# Altium PCB Driver.PcbDoc
Units mil, origin at the board's own origin, x right, y up, seen from the top; angles counter-clockwise.
Board outline 2559.06 x 2559.06 mil, 2 copper layers (Top Layer, Bottom Layer); 32 components, 34 nets, 97 pads, 16 vias.
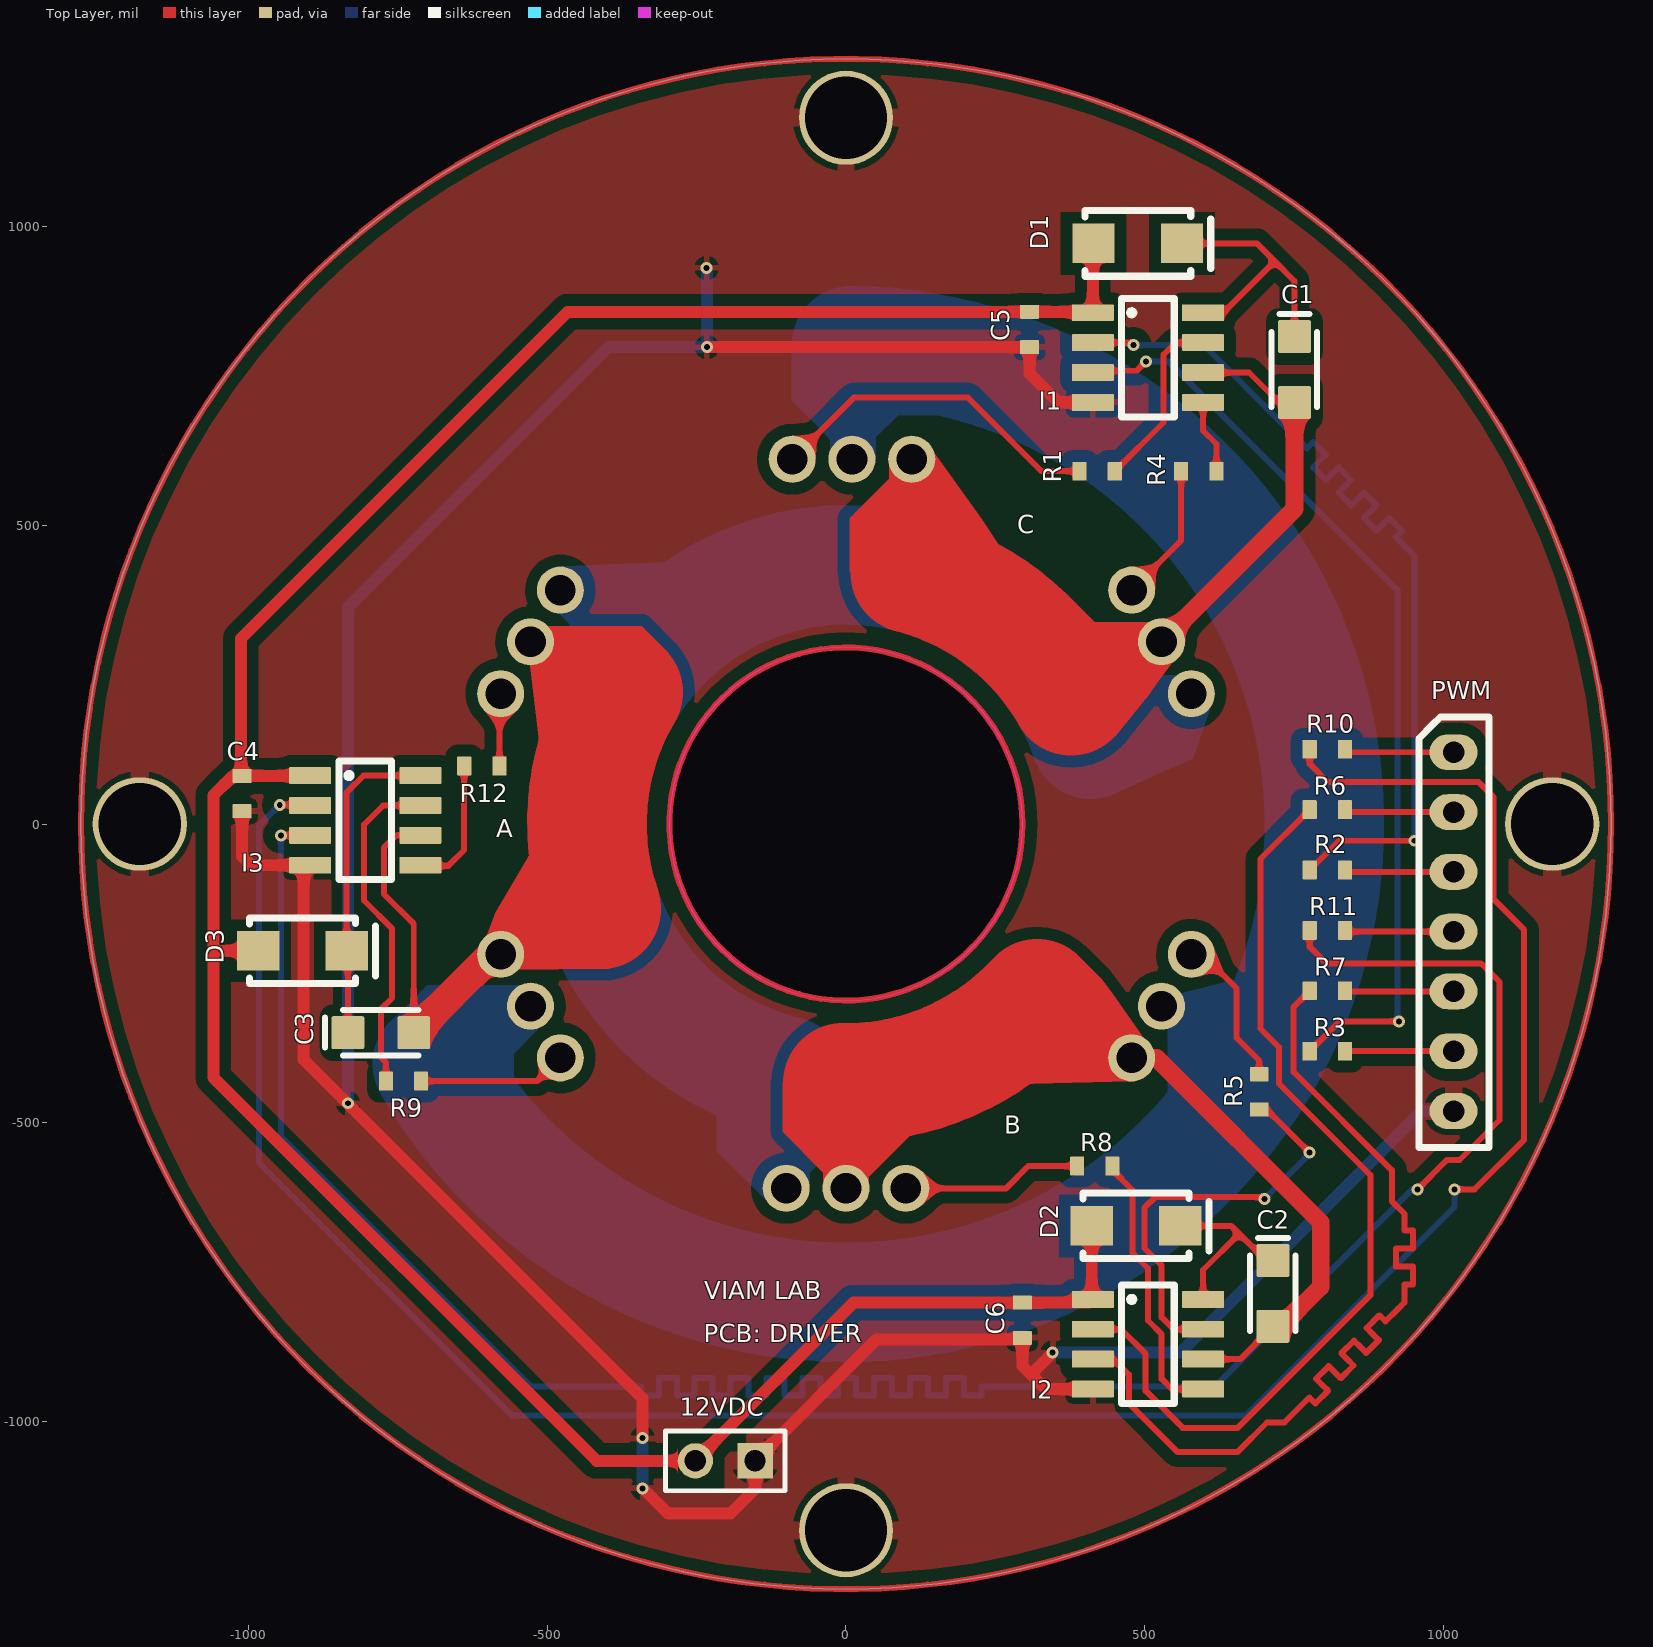
[diagram p0: Top Layer view]
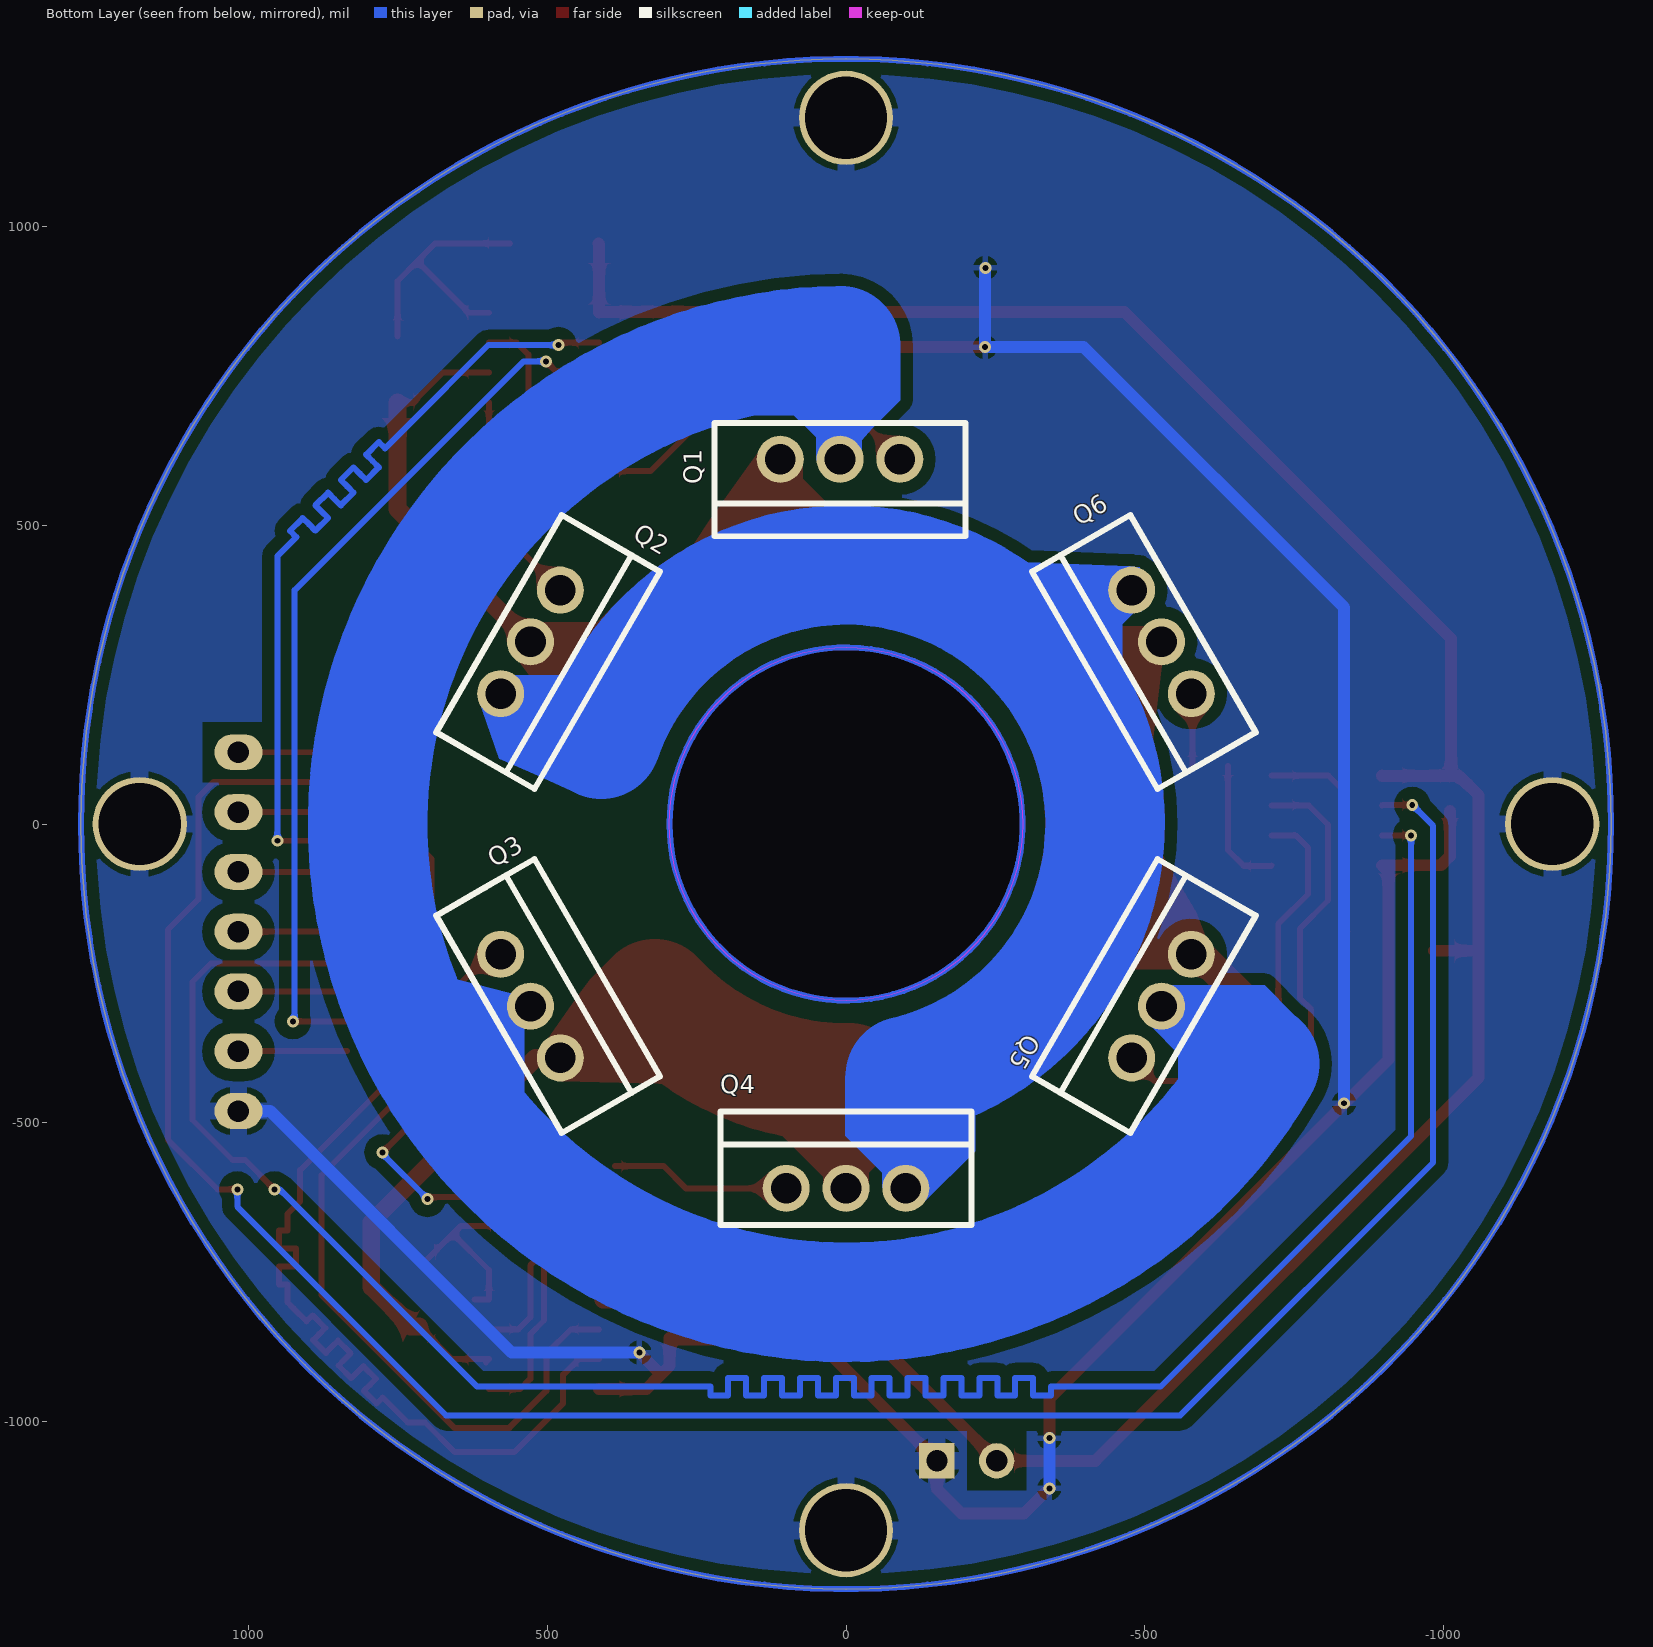
[diagram p1: Bottom Layer view, seen from below]
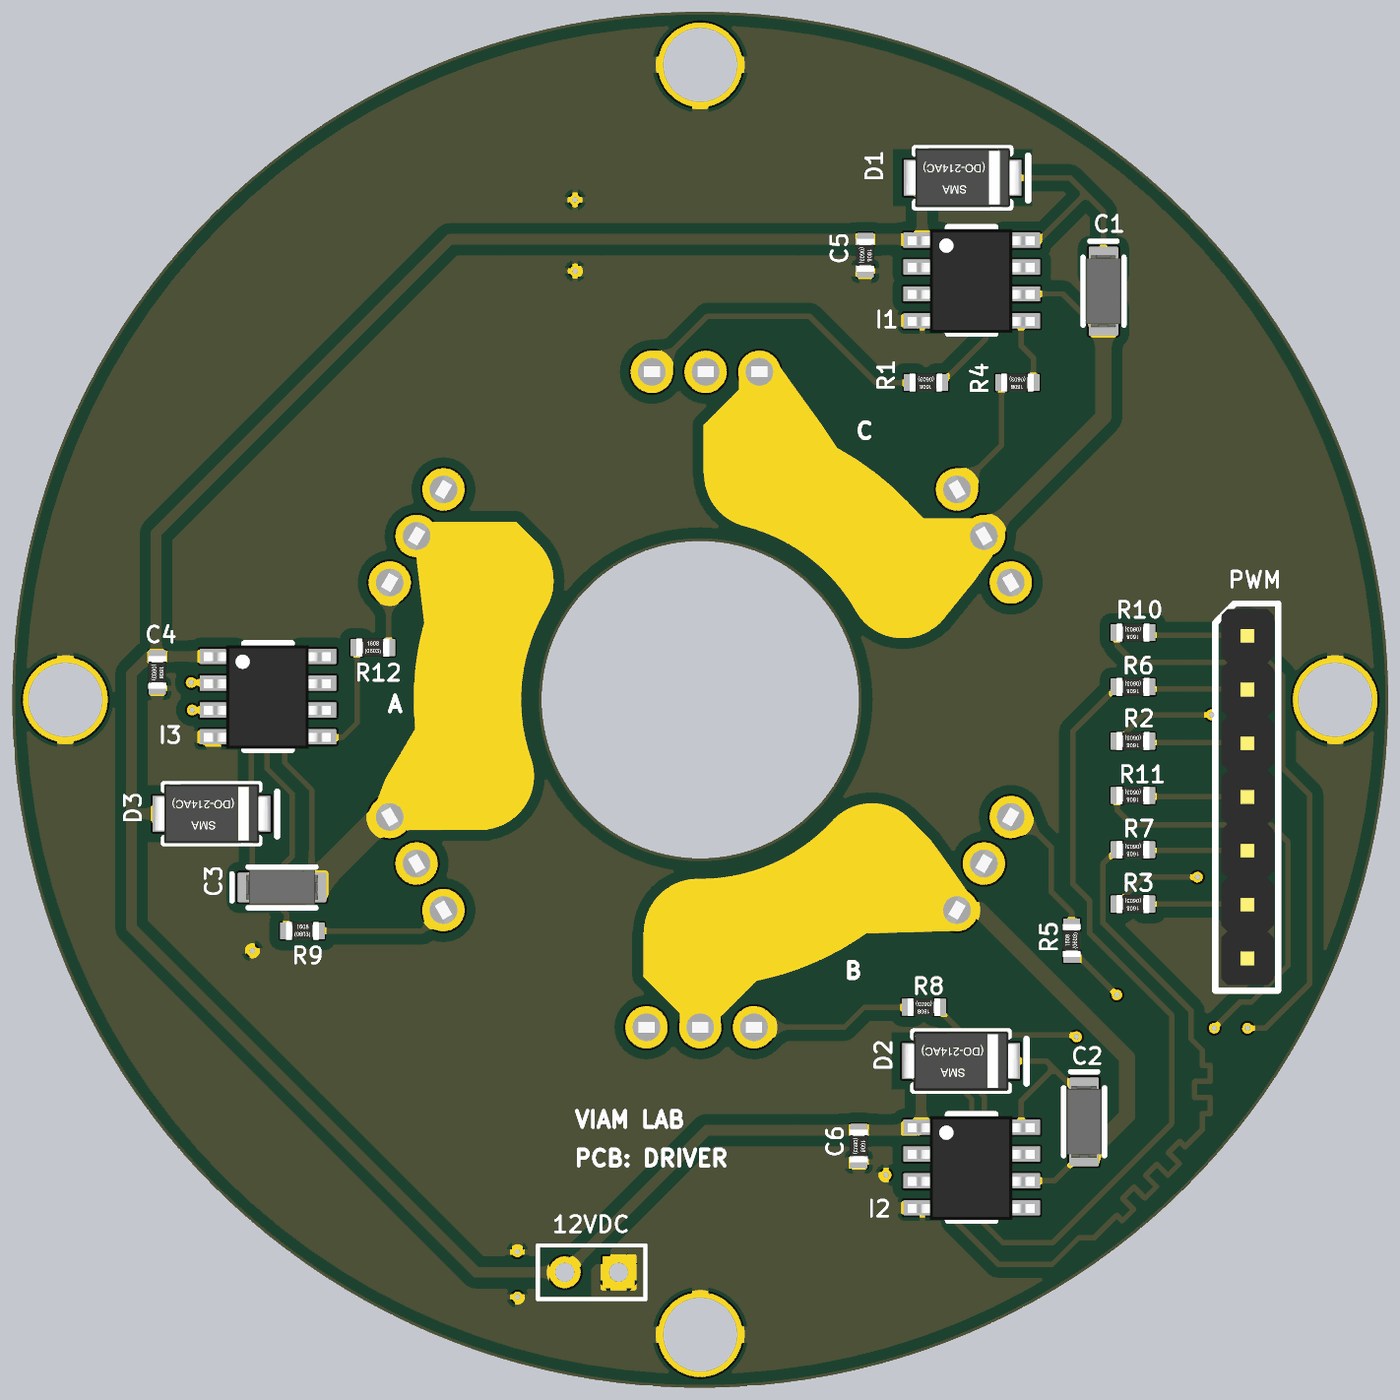
[diagram p2: 3D render of the assembled board from above, using the file's embedded part models]
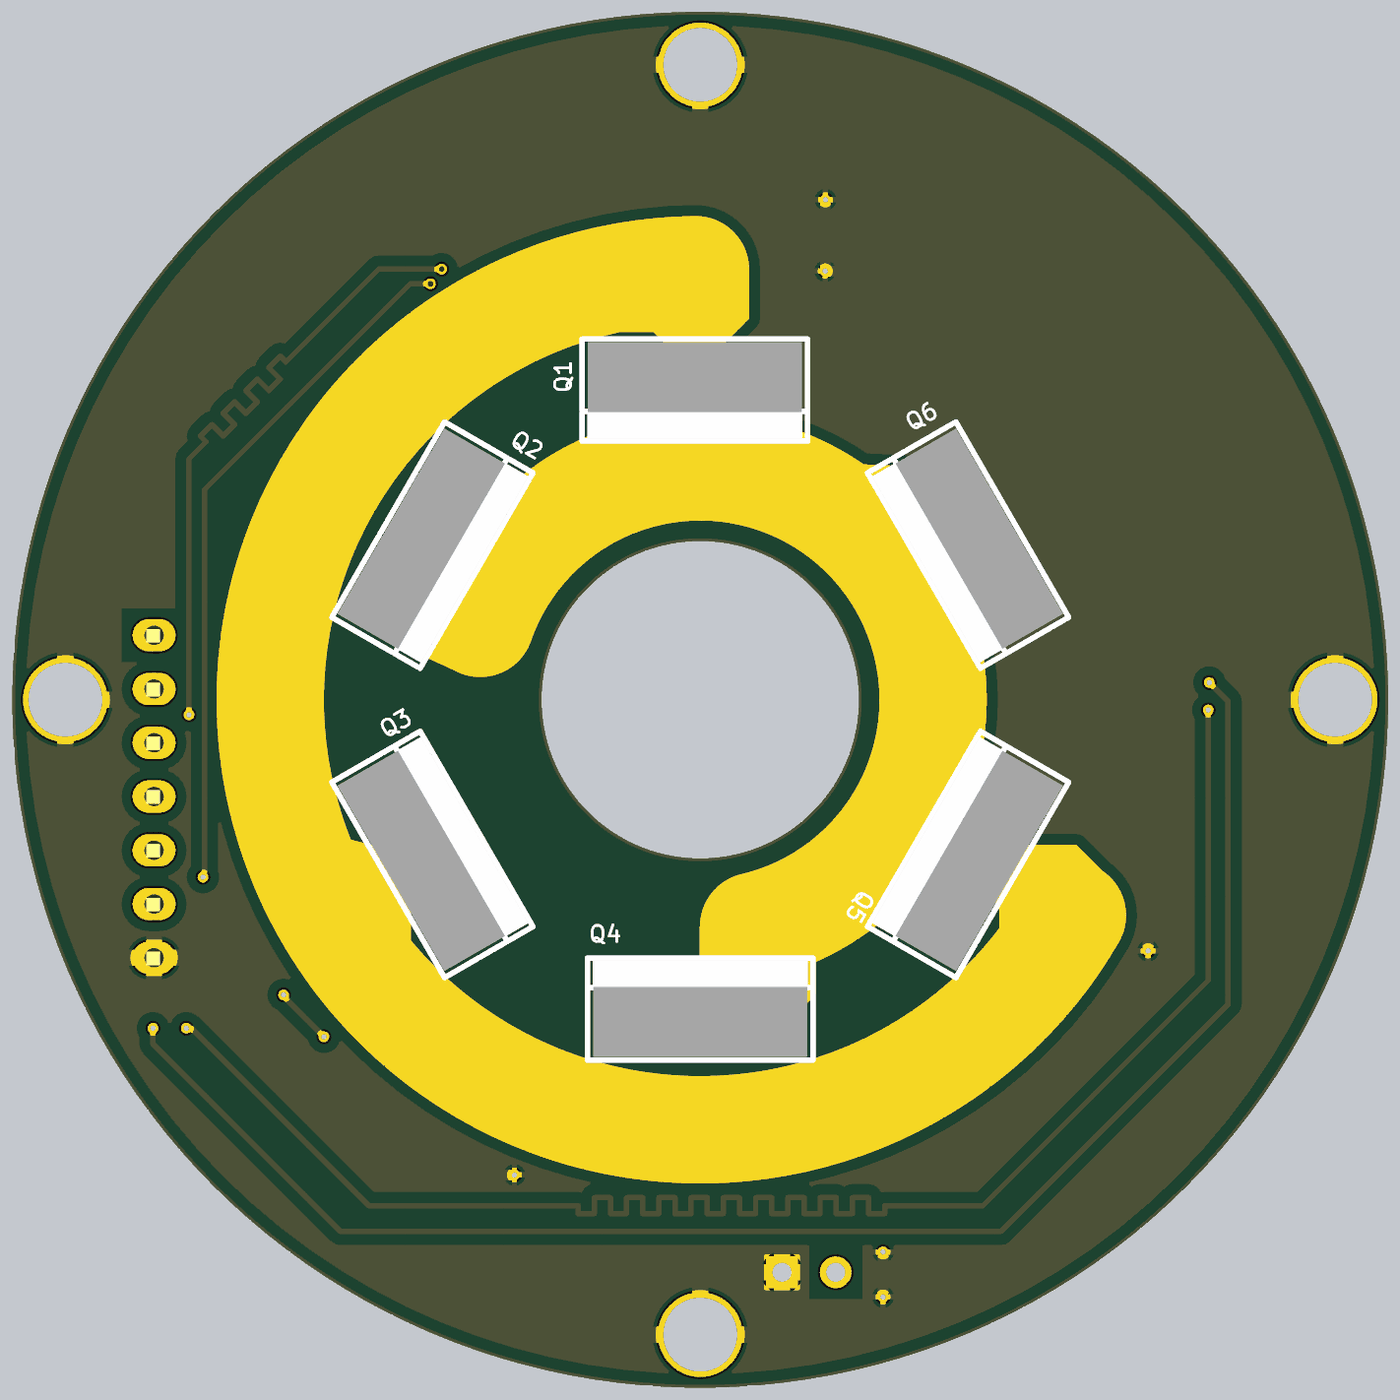
[diagram p3: 3D render of the assembled board from below, using the file's embedded part models]

## Layer stack, top to bottom
Top Solder: solder mask 0.4, Solder Resist, Dk 3.5
Top Layer: signal copper 1.4
Dielectric 1: dielectric 12.6, FR-4, Dk 4.8
Bottom Layer: signal copper 1.4
Bottom Solder: solder mask 0.4, Solder Resist, Dk 3.5

## Board outline
-1279.53,0 ccw(c0,0) 0,-1279.53 ccw(c0,0) 1279.53,0 ccw(c0,0) 0,1279.53 ccw(c0,0)
cut-out: -295.28,0 ccw(c0,0) 0,-295.28 ccw(c0,0) 295.28,0 ccw(c0,0) 0,295.28 ccw(c0,0)

## Design rules (kind name [scope] priority, off if disabled: settings)
Clearance [All] p1: gap=20 ignorepadtopadclearanceinfootprint=FALSE
MatchedLengths PWM_3 [InNetClass('PWM_3')] p1: tolerance=10 checknetsindiffpair=FALSE checkdiffpairvsdiffpair=TRUE checkxsignals=TRUE checkothers=TRUE
MatchedLengths PWM_2 [InNetClass('PWM_2')] p2: tolerance=10 checknetsindiffpair=FALSE checkdiffpairvsdiffpair=TRUE checkxsignals=TRUE checkothers=TRUE
MatchedLengths PWM_1 [InNetClass('PWM_1')] p3: tolerance=10 checknetsindiffpair=FALSE checkdiffpairvsdiffpair=TRUE checkxsignals=TRUE checkothers=TRUE
PolygonConnect PolygonConnect_3 [All vs IsNamedPolygon('Bottom Layer-GND')] p1: thpad.connectstyle=Relief thpad.reliefconductorwidth=30 thpad.reliefentries=4 thpad.polygonreliefangle="90 Angle" thpad.airgapwidth=10 smdpad.connectstyle=Relief smdpad.reliefconductorwidth=10 smdpad.reliefentries=4 smdpad.polygonreliefangle="90 Angle" smdpad.airgapwidth=10 via.connectstyle=Relief via.reliefconductorwidth=10 via.reliefentries=4 via.polygonreliefangle="90 Angle" via.airgapwidth=10
PolygonConnect PolygonConnect_2 [All vs IsNamedPolygon('Top Layer-GND')] p2: thpad.connectstyle=Relief thpad.reliefconductorwidth=30 thpad.reliefentries=4 thpad.polygonreliefangle="90 Angle" thpad.airgapwidth=10 smdpad.connectstyle=Relief smdpad.reliefconductorwidth=10 smdpad.reliefentries=4 smdpad.polygonreliefangle="90 Angle" smdpad.airgapwidth=10 via.connectstyle=Relief via.reliefconductorwidth=10 via.reliefentries=4 via.polygonreliefangle="90 Angle" via.airgapwidth=10
PolygonConnect PolygonConnect_1 [All vs IsNamedPolygon('Top Layer-GND')] p3: thpad.connectstyle=Relief thpad.reliefconductorwidth=30 thpad.reliefentries=4 thpad.polygonreliefangle="90 Angle" thpad.airgapwidth=10 smdpad.connectstyle=Relief smdpad.reliefconductorwidth=10 smdpad.reliefentries=4 smdpad.polygonreliefangle="90 Angle" smdpad.airgapwidth=10 via.connectstyle=Relief via.reliefconductorwidth=10 via.reliefentries=4 via.polygonreliefangle="90 Angle" via.airgapwidth=10
PolygonConnect [All] p4: connectstyle=Relief reliefconductorwidth=10 reliefentries=4 polygonreliefangle="90 Angle" airgapwidth=10
RoutingVias [All] p1: holewidth=28 width=50 viastyle="Through Hole" minholewidth=28 minwidth=50 maxholewidth=28 maxwidth=50
SolderMaskExpansion [All] p1: expansion=4
Width [All] p1: maxlimit=300 minlimit=10 preferedwidth=10
30 further rules are at their usual default settings.

## Components (designator, comment, footprint, x,y, rotation, side; value= is the part's Value field where it differs from the comment)
12VDC "12V" HDR1X2 -152,-1065 r180 top (schematic designator P1)
C1 "3.3uF/35V" "3.3uF/35V Bootstrap" 750,760 r90 top
C2 "3.3uF/35V" "3.3uF/35V Bootstrap" 714,-785 r90 top
C3 "3.3uF/35V" "3.3uF/35V Bootstrap" -778,-349 r180 top
C4 "104" "Non-Capacitor 104 SMD" -1010,51 r270 top
C5 "104" "Non-Capacitor 104 SMD" 307,827 r270 top
C6 "104" "Non-Capacitor 104 SMD" 295,-830 r270 top
D1 "US1D" US1D 488,971 r180 top
D2 "US1D" US1D 485,-672 r180 top
D3 "US1D" US1D -909,-212 r180 top
I1 "IR2101" IR2101S 505,780 r270 top
I2 "IR2101" IR2101S 505,-870 r270 top
I3 "IR2101" IR2101S -804,6 r270 top
PWM "Header 7x1" "Header 7 Male" 1016,120 r270 top (schematic designator H1)
Q1 "IRF3710" IRF3710 -90,610 r0 bottom
Q2 "IRF3710" IRF3710 477.64,391.23 r300 bottom
Q3 "IRF3710" IRF3710 577.64,-218.03 r240 bottom
Q4 "IRF3710" IRF3710 100,-609.26 r180 bottom
Q5 "IRF3710" IRF3710 -477.64,-391.23 r120 bottom
Q6 "IRF3710" IRF3710 -577.64,218.03 r60 bottom
R1 "33" "Resistor SMD 0603" 420,590 r180 top
R2 "33" "Resistor SMD 0603" 805,-77 r180 top
R3 "33" "Resistor SMD 0603" 805,-380 r180 top
R4 "33" "Resistor SMD 0603" 590,590 r180 top
R5 "33" "Resistor SMD 0603" 691,-448 r90 top
R6 "33" "Resistor SMD 0603" 805,24 r180 top
R7 "33" "Resistor SMD 0603" 805,-279 r180 top
R8 "33" "Resistor SMD 0603" 416,-572 r180 top
R9 "33" "Resistor SMD 0603" -740,-430 r0 top
R10 "33" "Resistor SMD 0603" 805,125 r180 top
R11 "33" "Resistor SMD 0603" 805,-178 r180 top
R12 "33" "Resistor SMD 0603" -609,97 r0 top

## Footprints (in the part's own frame and the unit in brackets; to place one, negate y for a bottom-side part, rotate by r counter-clockwise, add the part's x,y. Pads: shape width x height; smd on the part's side, far side on the other; paste and mask are expansions set on the pad)
"3.3uF/35V Bootstrap" [mil]
  rrect10% 55x55 smd mask+3.94: 1(55.12,0) 2(-55.12,0)
  silkscreen extent -63,-38 93,38, body extent -67,-33 67,33, height 67
HDR1X2 [mm] "Connector; Header; 2 Position"
  rect 1.5x1.5 hole 0.9: 1(0,0)
  round 1.5 hole 0.9: 2(2.54,0)
  silkscreen extent -1.27,-1.27 3.81,1.27, body extent -1.27,-1.27 3.81,1.27, height 7
"Header 7 Male" [mil]
  oval 60x80 hole 36 mask+3.94: 1(0,0) 2(100,0) 3(200,0) 4(300,0) 5(400,0) 6(500,0) 7(600,0)
  silkscreen extent -59,-58 661,59, body extent -49,-47 651,51, height 336
IR2101S [mm] "8 Lead SOIC"
  rrect10% 0.72x1.78 smd mask+0.1: 1(-1.905,-2.34) 2(-0.635,-2.34) 3(0.635,-2.34) 4(1.905,-2.34) 5(1.905,2.34) 6(0.635,2.34) 7(-0.635,2.34) 8(-1.905,2.34)
  silkscreen extent -2.51,-1.12 2.51,1.12, body extent -2.42,-3.03 2.48,2.97, height 1.75
IRF3710 [mm] "TO-220AB Package Outline"
  round 2 hole 1.3 mask+0.1: 1(0,0) 2(2.54,0) 3(5.08,0)
  silkscreen extent -2.79,-1.55 7.87,3.27, body extent -2.54,-1.4 7.62,3.17, height 18.54
"Non-Capacitor 104 SMD" [mm] "SMD0603"
  rrect10% 0.6x0.8 smd mask+0.07: 1(-0.75,0) 2(0.75,0)
  body extent -0.77,-0.42 0.78,0.43, height 0.45
"Resistor SMD 0603" [mm] "SMD 0603 inches"
  rrect10% 0.6x0.8 smd mask+0.07: 1(-0.75,0) 2(0.75,0)
  body extent -0.77,-0.42 0.78,0.43, height 0.45
US1D [mm] "Surface Mount Ultra Fast Rectifier/SMA (DO-214AC)"
  rect 1.8x1.68 smd mask+0.102: 1(-1.88,0) 2(1.88,0)
  silkscreen extent -3.1,-1.4 2.25,1.4, body extent -2.75,-1.4 2.75,1.4, height 2.6

## Part data
12VDC: library part "Header 2", "Header, 2-Pin", LatestRevisionDate=17-Jul-2002, LatestRevisionNote="Re-released for DXP Platform.", Publisher="Altium Limited"
R1 R2 R3 R4 R5 R6 R7 R8 R9 R10 R11 R12: library part Resistors

## Free pads (board coordinates)
  round 157.48 hole 137.79: 4(-1181,0) 4(0,-1181) 4(0,1181.1) 4(1181.1,0)

## Via types
v1: diameter 20, hole 10, Top Layer to Bottom Layer, 16 vias

## Nets (pads, with @x,y where several pads share a name; then routed paths per layer and width w, separated by ;. In a path a pad name is that pad's centre, name@x,y a point inside that pad or via, vN(x,y) a via of type N, cw(c..) or ccw(c..) an arc to the next point about the centre after c; other vN are vias at no path point)
12V: 12VDC.2 C4.1 C5.1 C6.1 D1.2 D2.2 D3.2 I1.1 I2.1 I3.1 | length 4693.3
  Top Layer w20: D3.2 -1054,-212 -1058,-208 ; I3.1 -896.6,80.53 C4.1 ; D2.2 410.98,-796.89 407.4,-800.47 C6.1 12.53,-800.47 12VDC.2 -417,-1065 -1058,-424 -1058,-208 ; D1.2 412.87,969.89 I1.1 411.35,856.53 C5.1 -465.47,856.53 -1012,310 -1012,82.53 C4.1 ; -1058,-208 -1058,48 -1025.47,80.53 C4.1
+VPS: Q1.2 Q3.2 Q5.2 | length 3340.9
  Bottom Layer w200: -692.22,-401.05 ccw(c0,0) 8.94,799.95
-VPS: Q2.3 Q4.3 Q6.3 | length 2198.1
  Bottom Layer w20: Q6.3 -423.98,391.23 -322.28,289.54 ; Q4.3 Q4.3@-100,-605 ; 409.26,142.16 485.12,218.03 Q2.3
  Bottom Layer w200: -99.34,-421.7 cw(c0,0) -322.28,289.54 cw(c0,0) 409.26,142.16
GND: 12VDC.1 C4.2 C5.2 C6.2 I1.4 I2.4 I3.4 pad.4 PWM.7 | length 5802.5
  Top Layer w20: C4.2 -1010,-54 -995,-69 I3.4 -907,-79.87 -907,-394 -816.65,-484.35 -340,-961 v1(-340,-1027) ; v1(-340,-1111) -298,-1153 -193,-1153 -152,-1112 12VDC.1 51,-862 292.53,-862 C6.2 295,-906 313,-924 ; v1(-232.53,797.47) C5.2 307,753 355,705 I1.4 ; v1(345.66,-884) 313,-916.66 313,-924 ; I2.4 334,-945 313,-924
  Bottom Layer w20: v1(-833,-467) -833,362 -397.53,797.47 v1(-232.53,797.47) -232.53,929.53 v1(-233,930) ; v1(-340,-1111) v1(-340,-1027) ; v1(345.66,-884) 559,-884 963,-480 PWM.7
M1: C1.2 I1.6 Q1.3 Q2.2 | length 1393.7
  Top Layer w10: I1.6 674,755 724.12,704.88 C1.2
  Top Layer w30: 107.17,419.74 110,422.57 Q1.3 ; 376.33,214.58 466.39,304.63 Q2.2 750,526.99 C1.2
  Top Layer w200: 107.17,419.74 cw(c0,0) 376.33,214.58
M2: C2.2 I2.6 Q3.3 Q4.2 | length 1534.1
  Top Layer w10: I2.6@602.36,-900.24 I2.6 659.12,-895 C2.2
  Top Layer w30: -5.03,-433.18 0,-438.2 Q4.2 ; 319.55,-292.5 418.28,-391.23 Q3.3 519.23,-391.23 794,-666 794,-774 727.88,-840.12 C2.2
  Top Layer w200: -5.03,-433.18 ccw(c0,0) 319.55,-292.5
M3: C3.2 I3.6 Q5.3 Q6.2 | length 1364.8
  Top Layer w10: C3.2 -722.88,-167.12 -773,-117 -773,-40 -752,-19 I3.6 ; Q6.2 -456.77,304.63 -372.8,220.66
  Top Layer w50: C3.2 -591.91,-218.03 Q5.3 -485.19,-218.03 -409.24,-142.08
  Top Layer w200: -409.24,-142.08 cw(c0,0) -372.8,220.66
NetC1_1: C1.1 D1.1 I1.8 | length 462.5
  Top Layer w10: D1.1 687,971 717,941 ; I1.8 631,855 717,941 ; C1.1 750,908 717,941
NetC2_1: C2.1 D2.1 I2.8 | length 337.3
  Top Layer w10: D2.1 644,-672 657.5,-685.5 ; I2.8@621,-795 I2.8 597.13,-745.87 657.5,-685.5 ; C2.1 701.88,-729.88 657.5,-685.5
NetC3_1: C3.1 D3.1 I3.8 | length 537.5
  Top Layer w10: C3.1 -833.12,-213.87 D3.1 -834.98,53.02 -807,81 I3.8
NetH1_1: PWM.1 R10.1 | length 183.5
  Top Layer w10: R10.1 839.53,120 PWM.1
NetH1_2: PWM.2 R6.1 | length 183.1
  Top Layer w10: R6.1 838.53,20 PWM.2
NetH1_3: PWM.3 R2.1 | length 182.7
  Top Layer w10: R2.1 837.53,-80 PWM.3
NetH1_4: PWM.4 R11.1 | length 182.3
  Top Layer w10: R11.1 836.53,-180 PWM.4
NetH1_5: PWM.5 R7.1 | length 181.9
  Top Layer w10: R7.1 835.53,-280 PWM.5
NetH1_6: PWM.6 R3.1 | length 181.5
  Top Layer w10: R3.1 PWM.6
NetI1_2: I1.2 R2.2 | length 1567.5
  Top Layer w10: I1.2 477,805 v1(481,801) ; R2.2 824.47,-28 v1(951,-28)
  Bottom Layer w10: v1(481,801) 598,801 737,662 770.69,628.31 781.28,638.9 802.49,617.69 791.9,607.1 781.31,596.51 802.53,575.3 813.11,585.89 823.7,596.47 844.92,575.26 834.33,564.67 823.74,554.08 844.95,532.87 855.54,543.46 866.13,554.05 887.34,532.83 876.75,522.25 866.17,511.66 887.38,490.45 897.97,501.03 908.55,511.62 929.77,490.41 919.18,479.82 940.39,458.61 951,448 v1(951,-28)
NetI1_3: I1.3 R3.2 | length 1567.9
  Top Layer w10: I1.3 415.87,758 486,758 v1(501.78,773.78) ; R3.2 825.47,-330 v1(925,-330)
  Bottom Layer w10: v1(501.78,773.78) 539.22,773.78 922,391 922,-327 v1(925,-330)
NetI1_5: I1.5 R4.1 | length 124.3
  Top Layer w10: I1.5 597.13,657.87 619.53,635.47 R4.1
NetI1_7: I1.7 R1.1 | length 303.2
  Top Layer w10: R1.1 531,671.47 531,785 551,805 I1.7
NetI2_2: I2.2 R6.2 | length 1583.1
  Top Layer w10: I2.2 460,-845 501,-886 501,-948 563,-1010 655,-1010 877,-788 877,-587 724,-434 724,-373 693,-342 693,-58.47 R6.2
NetI2_3: I2.3 R7.2 | length 1583.5
  Top Layer w10: I2.3 447,-895 473,-921 473,-969 554,-1050 655,-1050 704,-1001 733,-1001 774.9,-959.1 785.02,-969.22 806.24,-948.01 796.11,-937.89 785.99,-927.76 807.21,-906.55 817.33,-916.67 827.45,-926.79 848.66,-905.58 838.54,-895.46 828.42,-885.34 849.63,-864.12 859.75,-874.25 869.88,-884.37 891.09,-863.15 880.97,-853.03 870.85,-842.91 892.06,-821.7 902.18,-831.82 923.39,-810.61 934,-800 934,-770 948.31,-770 948.31,-740 934,-740 919.69,-740 919.69,-710 934,-710 948.31,-710 948.31,-680 934,-680 934,-665 934,-652 913,-631 913,-579 748.66,-414.66 748.66,-305.81 R7.2
NetI2_5: I2.5 R8.1 | length 466.3
  Top Layer w10: R8.1 445.53,-578.53 479,-612 479,-717.28 505,-743.28 505,-830.28 528,-853.28 528,-928 545,-945 I2.5
NetI2_7: I2.7 R5.1 | length 704.9
  Top Layer w10: I2.7 548,-845 528,-825 528,-738 499,-709 499,-642 517.07,-623.93 696.93,-623.93 v1(700,-627) ; R5.1 703.53,-477.53 v1(775,-549)
  Bottom Layer w10: v1(700,-627) 775,-552 v1(775,-549)
NetI3_2: I3.2 R10.2 | length 4112.1
  Top Layer w10: v1(-947,32) -897.13,32 I3.2 ; R10.2 775.47,100.53 806,70 1058,70 1083,45 1083,-126 1134,-177 1134,-528 1051,-611 v1(1018,-611)
  Bottom Layer w10: v1(-947,32) -982,-3 -982,-566 -559,-989 669,-989 1018,-640 v1(1018,-611)
NetI3_3: I3.3 R11.2 | length 4111.7
  Top Layer w10: v1(-945,-19) I3.3 ; R11.2 775.47,-205.47 803,-233 1062,-233 1093,-264 1093,-495 1026,-562 1005,-562 v1(956,-611)
  Bottom Layer w10: v1(-945,-19) -945,-522 -526,-941 -490,-941 -343,-941 -343,-955.82 -313,-955.82 -313,-941 -313,-926.18 -283,-926.18 -283,-941 -283,-955.82 -253,-955.82 -253,-941 -253,-926.18 -223,-926.18 -223,-941 -223,-955.82 -193,-955.82 -193,-941 -193,-926.18 -163,-926.18 -163,-941 -163,-955.82 -133,-955.82 -133,-941 -133,-926.18 -103,-926.18 -103,-941 -103,-955.82 -73,-955.82 -73,-941 -73,-926.18 -43,-926.18 -43,-941 -43,-955.82 -13,-955.82 -13,-941 -13,-926.18 17,-926.18 17,-941 17,-955.82 47,-955.82 47,-941 47,-926.18 77,-926.18 77,-941 77,-955.82 107,-955.82 107,-941 107,-926.18 137,-926.18 137,-941 137,-955.82 167,-955.82 167,-941 167,-926.18 197,-926.18 197,-941 197,-955.82 227,-955.82 227,-941 242,-941 617,-941 947,-611 v1(956,-611)
NetI3_5: I3.5 R12.1 | length 225.3
  Top Layer w10: I3.5 -710.87,-70 -665,-70 -638.53,-43.53 R12.1
NetI3_7: I3.7 R9.1 | length 567.2
  Top Layer w10: R9.1 -769.53,-398.47 -778,-390 -778,-310 -759,-291 -759,-175 -806,-128 -806,-1 -774,31 I3.7
NetQ1_1: Q1.1 R1.2 | length 574.1
  Top Layer w10: Q1.1 13,713 204,713 327,590 R1.2
NetQ2_1: Q2.1 R4.2 | length 233.1
  Top Layer w10: Q2.1 560.47,474.07 R4.2
NetQ3_1: Q3.1 R5.2 | length 258.2
  Top Layer w10: Q3.1 596.03,-218.03 653,-275 653,-357.47 691,-395.47 R5.2
NetQ4_1: Q4.1 R8.2 | length 301.9
  Top Layer w10: Q4.1 267.74,-609.26 305,-572 R8.2
NetQ5_1: Q5.1 R9.2 | length 248.9
  Top Layer w10: R9.2 -516.4,-430 Q5.1
NetQ6_1: Q6.1 R12.2 | length 121.8
  Top Layer w10: R12.2 -579.47,216.19 Q6.1
copper on no net: | length 19789.6
  Top Layer w10: 295.28,0 ccw(c0,0) 295.28,0 ; 1279.53,0 ccw(c0,0) 1279.53,0
  Bottom Layer w10: 295.28,0 ccw(c0,0) 295.28,0 ; 1279.53,0 ccw(c0,0) 1279.53,0

## Polygon pours and split planes (outlines as drawn)
GND on Bottom Layer "Bottom Layer-GND" (solid, remove dead copper, pour order 2): -1279.53,0 ccw(c0,0) 0,-1279.53 ccw(c0,0) 1279.53,0 ccw(c0,0) 0,1279.53 ccw(c0,0)
GND on Top Layer "Top Layer-GND" (solid, remove dead copper, pour order 0): -1279.53,0 ccw(c0,0) 0,-1279.53 ccw(c0,0) 1279.53,0 ccw(c0,0) 0,1279.53 ccw(c0,0)

## Other copper
Top Layer:
  pour cut-out: -295.28,0 ccw(c0,0) 0,-295.28 ccw(c0,0) 295.28,0 ccw(c0,0) 0,295.28 ccw(c0,0)
  region net M2: -38,-611 -38,-583 -106,-515 -106,-433 -6,-433 58,-369 107,-418 107,-521 38,-590 38,-604
  region net M2: 498,-358 445,-283 428,-260 385,-217 328,-254 315.83,-372.17 307,-388 280.5,-435.5 477,-430
  region net M3: -513,341 -503,331 -342,331 -297,286 -423,160 -423,114 -454,114 -513,138 -528,265 -536,271
  region net M3: -562,-253 -560,-253 -543,-236 -551,-242 -396,-242 -396,-197 -335,-136 -421,-50 -528,-50 -586,-148 -616,-227
  region net M1: 72,611 72,577 6,511 6,421 194,421 241,468 255,468 227,510 134,639
  region net M1: 545,269 520,235 507,217.32 450,147 409,134 308,235 308,321 318,321 375,378 416,337 507,337
  region: 6,421
Bottom Layer:
  region net +VPS: -26,606 -26,642 -43,661 -91,709 -91,799 98,799 152,745 152,684 87,684 50,647 50,608
  region net +VPS: 538.23,-289.1 668,-255.36 668,-354 595,-427 538,-452 538,-341 528,-341
  region net +VPS: -511,-339 -556,-384 -556,-435 -570,-435 -687,-318 -748,-318 -700,-270 -544,-270
  region net -VPS: -61,-608 -61,-583 1,-521 1,-421 -21,-421 -62,-380 -194,-380 -217,-403 -216,-404 -216,-547 -130,-633
  region net -VPS: 443,48 522,84 580,109 615,210 556,210 556,249 434,249 424,259
  region net -VPS: -495,356 -484,356 -462,334 -462,264 -391,264 -303,352 -303,438 -475.15,430.73 -490.92,429.35
  region: -32,629
  region: -30,610
  region: 495,-285
  region: 535,-280

## Silkscreen, mask and mechanical layers (free items; w line width, h text height)
Top Overlay:
  text "C" at 286,486 h30
  text "A" at -585,-22 h30
  text "B" at 265,-518 h30
  text "VIAM LAB" at -237,-795 h30
  text "PCB: DRIVER" at -238,-867 h30
Top Solder:
  region: 498,-358 445,-283 428,-260 385,-217 328,-254 315.83,-372.17 307,-388 280.5,-435.5 477,-430
  region: -38,-611 -38,-583 -106,-515 -106,-433 -6,-433 58,-369 107,-418 107,-521 38,-590 38,-604
  region: -562,-253 -560,-253 -543,-236 -551,-242 -396,-242 -396,-197 -335,-136 -421,-50 -528,-50 -586,-148 -616,-227
  region: -513,341 -503,331 -342,331 -297,286 -423,160 -423,114 -454,114 -513,138 -528,265 -536,271
  region: 545,269 520,235 507,217.32 450,147 409,134 308,235 308,321 318,321 375,378 416,337 507,337
  region: 72,611 72,577 6,511 6,421 194,421 241,468 255,468 227,510 134,639
  lines w200: -409.24,-142.08 cw(c0,0) -372.8,220.66 ; -5.03,-433.18 ccw(c0,0) 319.55,-292.5 ; 107.17,419.74 cw(c0,0) 376.33,214.58
Bottom Solder:
  region: -511,-339 -556,-384 -556,-435 -570,-435 -687,-318 -748,-318 -700,-270 -544,-270
  region: 538.23,-289.1 668,-255.36 668,-354 595,-427 538,-452 538,-341 528,-341
  region: -26,606 -26,642 -43,661 -91,709 -91,799 98,799 152,745 152,684 87,684 50,647 50,608
  region: -61,-608 -61,-583 1,-521 1,-421 -21,-421 -62,-380 -194,-380 -217,-403 -216,-404 -216,-547 -130,-633
  region: 443,48 522,84 580,109 615,210 556,210 556,249 434,249 424,259
  region: -495,356 -484,356 -462,334 -462,264 -391,264 -303,352 -303,438 -475.15,430.73 -490.92,429.35
  lines w200: -692.22,-401.05 ccw(c0,0) 8.94,799.95 ; -99.34,-421.7 cw(c0,0) 409.26,142.16

## Text inside footprints (layer, text, board x,y; h text height)
Q1: Mechanical 1 "G" at -110,640 h60 r180; Mechanical 1 "D" at -7,641 h60 r180; Mechanical 1 "S" at 92,641 h60 r180
Q2: Mechanical 1 "G" at 493.62,423.55 h60 r120; Mechanical 1 "D" at 545.98,334.85 h60 r120; Mechanical 1 "S" at 595.48,249.12 h60 r120
Q3: Mechanical 1 "G" at 613.62,-215.71 h60 r60; Mechanical 1 "D" at 562.98,-305.41 h60 r60; Mechanical 1 "S" at 513.48,-391.14 h60 r60
Q4: Mechanical 1 "G" at 120,-639.26 h60; Mechanical 1 "D" at 17,-640.26 h60; Mechanical 1 "S" at -82,-640.26 h60
Q5: Mechanical 1 "G" at -493.62,-423.55 h60 r300; Mechanical 1 "D" at -545.98,-334.85 h60 r300; Mechanical 1 "S" at -595.48,-249.12 h60 r300
Q6: Mechanical 1 "G" at -613.62,215.71 h60 r240; Mechanical 1 "D" at -562.98,305.41 h60 r240; Mechanical 1 "S" at -513.48,391.14 h60 r240